# EAGLE board 32u4.Simple.Breakout (EAGLE 7.4.0)
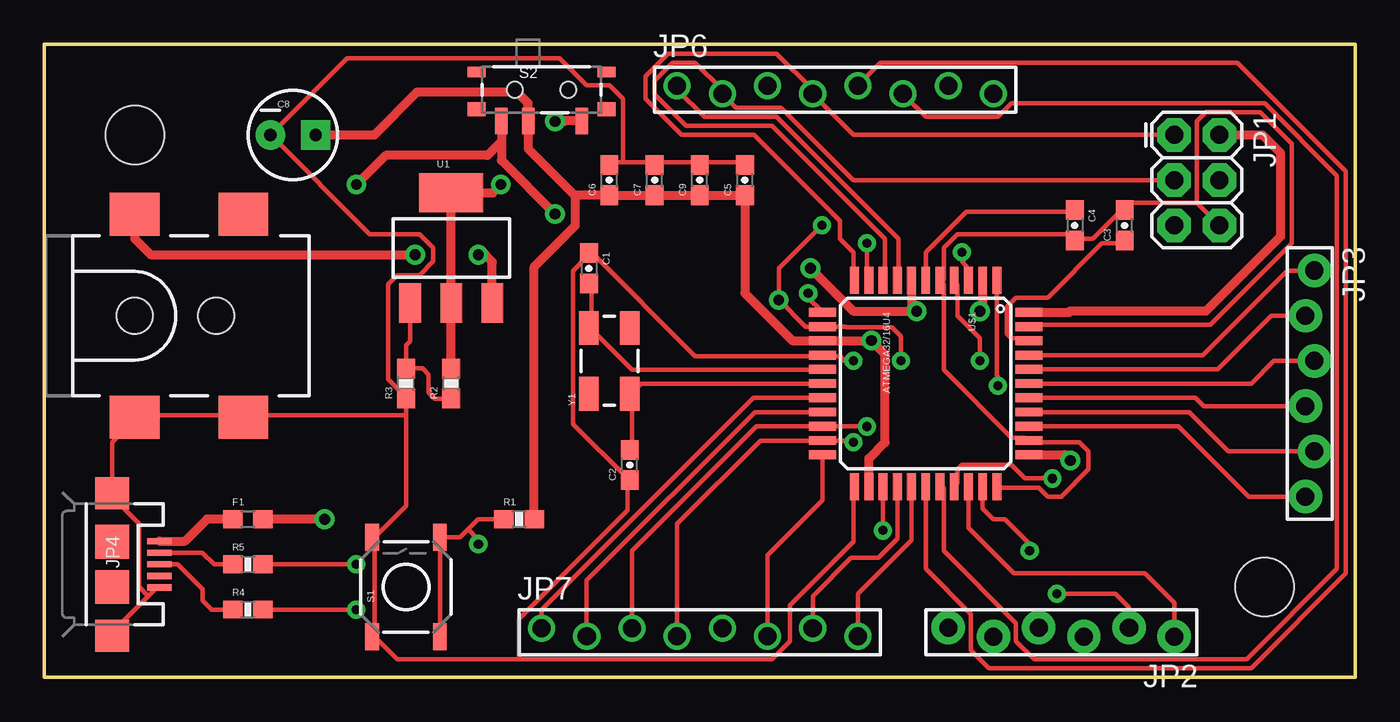
[diagram p0: board, top side]
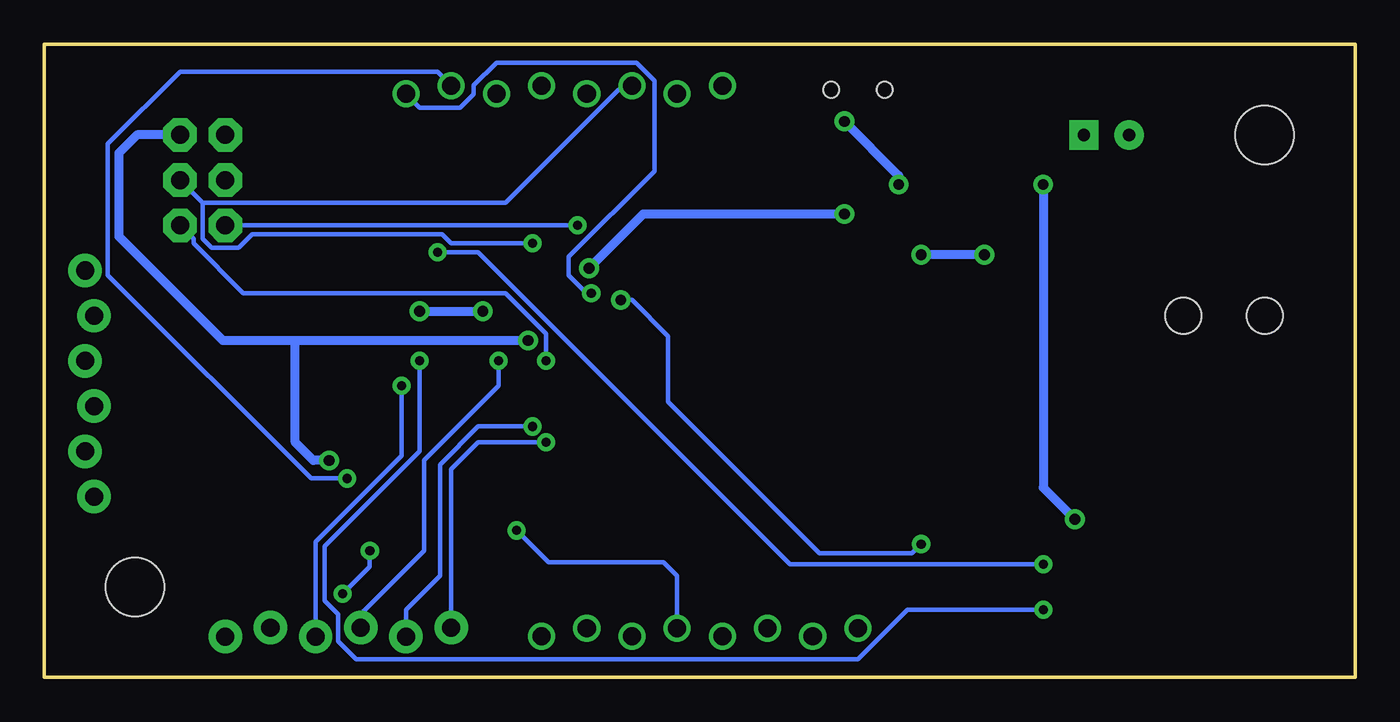
[diagram p1: board, bottom side, seen from below]

Size 73.66 x 35.56 mm. Coordinates in mm from the lower left corner, seen from the top.
Outline: 0,0 73.66,0 73.66,35.56 0,35.56 0,0
Copper layers (1*16): Top 0.035mm / dielectric 1.5mm / Bottom 0.035mm
Design rules "SparkFun-2-layer-STANDARD": minimum track width 10mil, minimum drill 20mil, track to track 10mil, track to pad 8mil, pad to pad 8mil, via to via 10mil, smd to smd 8mil, copper to edge 8mil, drill to drill 8mil, minimum pad ring 10mil, minimum via ring 10mil, stop-mask expansion 4mil, vias tented up to drill 20mil, thermal gap 10mil

## Footprints (pad centres in the part's own frame; a part is rotated, then mirrored left to right if it is on the bottom)
0603-CAP = smd 1.1 x 1: 1 -0.85,0; 2 0.85,0
CPOL-RADIAL-10UF-25V = drill 0.7 pad 1.651 square: 1 1.27,0 | drill 0.7 pad 1.651: 2 -1.27,0
0603 = smd 1.1 x 1: 1 -0.85,0; 2 0.85,0
2X3 = drill 1.016 pad 1.88 octagon: 1 0,0; 2 0,2.54; 3 2.54,0; 4 2.54,2.54; 5 5.08,0; 6 5.08,2.54
1X06_FEMALE_LOCK.010 = drill 1.016 pad 1.88: 1 0,0.254; 2 2.54,-0.254; 3 5.08,0.254; 4 7.62,-0.254; 5 10.16,0.254; 6 12.7,-0.254
USB-MICROB = smd 0.35 x 1.4: D+ 0,2.65; D- -0.65,2.65; GND 1.3,2.65; ID 0.65,2.65; VBUS -1.3,2.65 | smd 1.8 x 1.9: MT1 -4,0; MT2 4,0 | smd 1.9 x 1.9: P$1 -1.27,0; P$2 1.27,0
POWER_JACK_SMD = smd 2.8 x 2.4: GND 0,-5.7; P$4 6.1,-5.7; VIN0 0,5.7; VIN1 6.1,5.7 | hole 2.032: 0,0; 4.572,0
1X08_FEMALE_LOCK = drill 1.016: 1 0,0.229; 2 2.54,-0.229; 3 5.08,0.229; 4 7.62,-0.229; 5 10.16,0.229; 6 12.7,-0.229; 7 15.24,0.229; 8 17.78,-0.229
0603-RES = smd 1.1 x 1: 1 -0.85,0; 2 0.85,0
TACTILE-SWITCH-SMD = smd 1.524 x 0.762: 1 -2.794,1.905; 2 2.794,1.905; 3 -2.794,-1.905; 4 2.794,-1.905
SWITCH-SPST-SMD-A = smd 0.7 x 1.5: 1 -2.25,-1.75; 2 -0.75,-1.75; 3 2.25,-1.75 | smd 1 x 0.6: GND1 -3.65,1; GND3 3.65,1 | smd 1 x 0.8: GND2 -3.65,-1.1; GND4 3.65,-1.1 | hole 0.9: -1.5,0; 1.5,0
SOT223 = smd 1.219 x 2.235: 1 -2.311,-3.099; 2 0,-3.099; 3 2.311,-3.099 | smd 3.6 x 2.2: 4 0,3.099
TQFP_44_0.8MM = smd 1.5 x 0.5: P$1 -5.8,4; P$2 -5.8,3.2; P$3 -5.8,2.4; P$4 -5.8,1.6; P$5 -5.8,0.8; P$6 -5.8,0; P$7 -5.8,-0.8; P$8 -5.8,-1.6; P$9 -5.8,-2.4; P$10 -5.8,-3.2; P$11 -5.8,-4; P$23 5.8,-4; P$24 5.8,-3.2; P$25 5.8,-2.4; P$26 5.8,-1.6; P$27 5.8,-0.8; P$28 5.8,0; P$29 5.8,0.8; P$30 5.8,1.6; P$31 5.8,2.4; P$32 5.8,3.2; P$33 5.8,4 | smd 0.5 x 1.5: P$12 -4,-5.8; P$13 -3.2,-5.8; P$14 -2.4,-5.8; P$15 -1.6,-5.8; P$16 -0.8,-5.8; P$17 0,-5.8; P$18 0.8,-5.8; P$19 1.6,-5.8; P$20 2.4,-5.8; P$21 3.2,-5.8; P$22 4,-5.8; P$34 4,5.8; P$35 3.2,5.8; P$36 2.4,5.8; P$37 1.6,5.8; P$38 0.8,5.8; P$39 0,5.8; P$40 -0.8,5.8; P$41 -1.6,5.8; P$42 -2.4,5.8; P$43 -3.2,5.8; P$44 -4,5.8
STAND-OFF = hole 3.302: 0,0
CRYSTAL-SMD-5X3 = smd 1.9 x 1.1: 1 -1.85,-1.15; 2 1.85,-1.15; 3 1.85,1.15; 4 -1.85,1.15

## Placement (x,y rotation side)
C1  18pf  [0603-CAP]  30.61,22.99 270 top
C2  18pf  [0603-CAP]  32.89,11.94 90 top
C3  10uf  [0603-CAP]  60.71,25.4 90 top
C4  1uf  [0603-CAP]  57.91,25.4 270 top
C5  0.1uf  [0603-CAP]  39.37,27.94 90 top
C6  0.1uf  [0603-CAP]  31.75,27.94 90 top
C7  1uf  [0603-CAP]  34.29,27.94 90 top
C8  10 uf  [CPOL-RADIAL-10UF-25V]  13.97,30.48 0 top
C9  0.1uf  [0603-CAP]  36.83,27.94 90 top
F1  PTC0603  [0603]  11.43,8.89 0 top
FRAME1  FRAME-LETTER  [CREATIVE_COMMONS]  24.13,-8.89 0 top  (outside the outline)
JP1  FEMALE 2x3  [2X3]  63.5,30.48 270 top
JP2  [1X06_FEMALE_LOCK.010]  63.5,2.54 180 top
JP3  [1X06_FEMALE_LOCK.010]  71.12,22.86 270 top
JP4  USB-MICROB  [USB-MICROB]  3.81,6.35 270 top
JP5  5.5x2.1mm Barrel  [POWER_JACK_SMD]  5.08,20.32 0 top
JP6  [1X08_FEMALE_LOCK]  35.56,33.02 0 top
JP7  [1X08_FEMALE_LOCK]  27.94,2.54 0 top
R1  10k  [0603-RES]  26.67,8.89 0 top
R2  240  [0603-RES]  22.86,16.51 90 top
R3  720  [0603-RES]  20.32,16.51 90 top
R4  22  [0603-RES]  11.43,3.81 0 top
R5  22  [0603-RES]  11.43,6.35 0 top
S1  SWITCH-MOMENTARY-2SMD-REDUNDANT  [TACTILE-SWITCH-SMD]  20.32,5.08 90 top
S2  SPDT Switch  [SWITCH-SPST-SMD-A]  27.94,33.02 0 top
U1  [SOT223]  22.86,24.13 0 top
U$1  ATMEGA32/16U4  [TQFP_44_0.8MM]  49.53,16.51 270 top
U$3  [STAND-OFF]  5.08,30.48 0 top
U$4  [STAND-OFF]  68.58,5.08 0 top
Y1  16Mhz  [CRYSTAL-SMD-5X3]  31.75,17.78 90 top

## Library data of the parts
C1-C9 = SparkFun-Capacitors
F1 = SparkFun-PowerIC
FRAME1 = SparkFun-Aesthetics
JP1 = SparkFun-Connectors; PROD_ID: CONN-11566
JP2 JP3 JP6 JP7 = SparkFun-Connectors
JP4 = SparkFun-Connectors; PROD_ID: CONN-09505
JP5 = SparkFun-Connectors; PROD_ID: CONN-08106; SF_ID: PRT-12748
R1-R3 = SparkFun-Passives
R4 R5 = SparkFun-Resistors
S1 = SparkFun-Electromechanical; PROD_ID: SWCH-08247
S2 U$3 U$4 = SparkFun-Electromechanical
U1 = SparkFun-PowerIC; PROD_ID: VREG-08170
U$1 = Kenny
Y1 = SparkFun-FreqCtrl; PROD_ID: XTAL-08218

## Nets
D+: JP4.D+ R4.1
D-: JP4.D- R5.1
DCINVCC: R2.2 S2.3 U1.2 U1.4
GND: C1.1 C2.1 C3.2 C4.2 C5.2 C6.2 C7.2 C8.2 C9.2 JP1.6 JP4.GND JP4.MT1 JP4.MT2 JP5.GND JP5.P$4 R3.1 S1.1 S1.2 U$1.P$5 U$1.P$15 U$1.P$23 U$1.P$33 U$1.P$35 U$1.P$43
N$1: C3.1 U$1.P$42
N$2: C4.1 U$1.P$6
N$3: R2.1 R3.2 U1.1
N$4: JP5.VIN0 U1.3
N$5: R4.2 U$1.P$4
N$6: R5.2 U$1.P$3
N$7: F1.1 JP4.VBUS
PB0/SS: JP6.1 U$1.P$8
PB1/SCK: JP1.3 JP6.2 U$1.P$9
PB2/MOSI: JP1.4 JP6.3 U$1.P$10
PB3/MISO: JP1.1 JP6.4 U$1.P$11
PB4/ADC11: JP6.5 U$1.P$28
PB5/ADC12: JP6.6 U$1.P$29
PB6/ADC13: JP6.7 U$1.P$30
PB7: JP6.8 U$1.P$12
PC6: JP2.1 U$1.P$31
PC7: JP2.2 U$1.P$32
PD0/SCL: JP7.1 U$1.P$18
PD1/INT1: JP7.2 U$1.P$19
PD2/RX1: JP2.5 JP7.3 U$1.P$20
PD3/TX1: JP2.6 JP7.4 U$1.P$21
PD4/ADC8: JP7.5 U$1.P$25
PD5/XCK1: JP7.6 U$1.P$22
PD6/ADC9: JP7.7 U$1.P$26
PD7/ADC10: JP7.8 U$1.P$27
PE6/AIN+: JP2.3 U$1.P$1
PF0/ADC0: JP3.1 U$1.P$41
PF1/ADC1: JP3.2 U$1.P$40
PF4/ADC4: JP3.3 U$1.P$39
PF5/ADC5: JP3.4 U$1.P$38
PF6/ADC6: JP3.5 U$1.P$37
PF7/ADC7: JP3.6 U$1.P$36
RST: JP1.5 JP2.4 R1.1 S1.3 S1.4 U$1.P$13
USBVCC: F1.2 S2.1 U$1.P$2 U$1.P$7
VCC: C5.1 C6.1 C7.1 C8.1 C9.1 JP1.2 R1.2 S2.2 U$1.P$14 U$1.P$24 U$1.P$34 U$1.P$44
XTAL1: C2.2 U$1.P$17 Y1.1
XTAL2: C1.2 U$1.P$16 Y1.3

## Tracks (layer width: path | path; a pad name or v marks a point on that pad's centre or on a via)
D+
  Top 0.254: JP4.D+ 7.49,6.35 8.89,4.95 8.89,4.32 9.4,3.81 R4.1
D-
  Top 0.254: R5.1 9.53,6.35 8.88,7 JP4.D-
DCINVCC  (via drill 0.6)
  Top 0.508: R2.2 U1.2 U1.4 25.2,27.23 v25.65,27.69 | v28.7,31.24 29.21,31.24 29.24,31.27 S2.3
  Bottom 0.508: v25.65,27.69 25.65,28.19 v28.7,31.24
GND  (via drill 0.51)
  Top 0.254: 5.84,4.57 3.81,2.54 JP4.MT2 | 5.84,4.57 6.35,5.08 JP4.GND | 5.84,4.57 5.33,5.08 5.33,8.64 3.81,10.16 JP4.MT1 3.81,13.21 5.08,14.48 JP5.GND 5.08,14.73 11.18,14.73 JP5.P$4 11.43,14.73 20.32,14.73 | 34.29,28.96 32.51,28.96 | 32.51,28.96 31.75,28.96 C6.2 | 34.29,28.96 36.83,28.96 | 34.29,28.96 C7.2 | 36.83,28.96 39.37,28.96 C5.2 | 36.83,28.96 C9.2 | 20.32,14.73 20.32,9.65 18.54,7.87 | 20.32,14.73 R3.1 20.32,15.75 19.3,16.76 19.3,22.1 19.81,22.61 21.08,22.61 21.84,23.37 21.84,24.13 21.08,24.89 18.29,24.89 C8.2 17.02,34.8 28.96,34.8 30.48,33.27 31.75,33.27 32.51,32.51 32.51,28.96 | 64.77,26.67 64.77,31.24 65.28,31.75 68.33,31.75 70.1,29.97 70.1,24.38 65.53,19.81 55.37,19.81 U$1.P$43 | JP1.6 64.77,26.67 | U$1.P$33 53.59,10.67 55.88,10.67 56.39,10.16 57.15,10.16 58.67,11.68 58.67,12.7 58.17,13.21 55.37,13.21 U$1.P$35 55.12,13.46 54.36,13.46 50.55,17.27 50.55,22.1 U$1.P$5 50.55,22.35 50.55,24.13 51.31,24.89 57.66,24.89 57.91,24.64 | 57.91,24.64 58.93,24.64 60.71,26.42 | 57.91,24.64 C4.2 | 64.77,26.67 60.96,26.67 60.71,26.42 | 60.71,26.42 C3.2 | 26.67,1.02 19.81,1.02 18.54,2.29 | 26.67,1.02 40.89,1.02 41.91,2.03 41.91,4.06 45.47,7.62 45.47,10.67 U$1.P$23 | 26.67,1.02 26.67,3.3 32.77,9.4 32.77,10.92 C2.1 32.77,11.18 29.72,14.22 29.72,22.86 30.48,23.62 C1.1 30.73,23.88 36.58,18.03 43.69,18.03 U$1.P$15 43.94,18.03 44.7,18.03 44.96,17.78 v45.47,17.78 | 18.54,2.29 18.54,7.87 | 18.54,7.87 S1.2 | 18.54,2.29 S1.1
  Bottom 0.254: JP1.6 65.28,24.64 65.28,24.38 62.48,21.59 47.75,21.59 45.47,19.3 v45.47,17.78
N$1
  Top 0.254: C3.1 60.71,24.38 59.44,24.38 56.39,21.34 54.61,21.34 54.1,20.83 54.1,19.3 54.36,19.05 55.12,19.05 U$1.P$42
N$2
  Top 0.254: U$1.P$6 49.53,23.88 51.82,26.16 57.91,26.16 C4.1
N$3
  Top 0.254: U1.1 20.55,18.9 20.32,18.67 R3.2 21.25,17.36 21.59,17.02 21.59,16 21.93,15.66 R2.1
N$4  (via drill 0.6)
  Top 0.508: JP5.VIN0 5.08,24.64 5.97,23.75 v20.83,23.75 | v24.38,23.75 24.77,23.75 25.17,23.34 U1.3
  Bottom 0.508: v20.83,23.75 v24.38,23.75
N$5  (via drill 0.51)
  Top 0.254: v17.53,3.81 R4.2 | v52.58,17.78 52.58,19.05 51.31,20.32 51.31,22.1 U$1.P$4
  Bottom 0.254: v17.53,3.81 25.15,3.81 27.94,1.02 56.13,1.02 57.15,2.03 57.15,3.56 57.91,4.32 57.91,7.37 52.58,12.7 v52.58,17.78
N$6  (via drill 0.51)
  Top 0.254: v17.53,6.35 R5.2 | v51.56,23.88 51.56,23.37 51.82,23.11 51.82,22.35 U$1.P$3
  Bottom 0.254: v17.53,6.35 31.75,6.35 49.28,23.88 v51.56,23.88
N$7
  Top 0.508: JP4.VBUS 7.9,7.65 9.14,8.89 F1.1
PB0/SS
  Top 0.254: U$1.P$8 48.01,22.35 48.01,24.64 41.15,31.5 37.08,31.5 35.56,33.02 JP6.1
PB1/SCK
  Top 0.254: U$1.P$9 47.24,22.35 47.24,24.64 40.89,30.99 36.07,30.99 34.29,32.77 34.29,33.53 35.31,34.54 36.58,34.54 38.1,33.02 JP6.2 38.1,32.77 38.86,32 41.4,32 45.47,27.94 JP1.3
PB2/MOSI  (via drill 0.51)
  Top 0.254: v46.23,24.38 46.23,22.35 U$1.P$10
  Bottom 0.254: v46.23,24.38 50.8,24.38 51.31,24.89 61.98,24.89 62.74,24.13 64.26,24.13 64.77,24.64 64.77,26.67 | JP1.4 64.77,26.67 | 64.77,26.67 47.75,26.67 41.4,33.02 40.64,33.02 JP6.3
PB3/MISO
  Top 0.254: U$1.P$11 45.47,22.35 45.47,23.88 44.7,24.64 44.7,25.65 39.88,30.48 35.81,30.48 33.78,32.51 33.78,33.78 35.05,35.05 41.15,35.05 43.18,33.02 JP6.4 43.18,32.77 45.47,30.48 JP1.1
PB4/ADC11
  Top 0.254: U$1.P$28 49.53,6.1 52.07,3.56 52.07,1.52 53.09,0.51 67.82,0.51 73.15,5.84 73.15,28.45 67.06,34.54 46.99,34.54 45.72,33.27 JP6.5
PB5/ADC12
  Top 0.254: U$1.P$29 50.55,10.67 50.55,7.11 54.61,3.05 54.61,2.03 55.63,1.02 67.56,1.02 72.64,6.1 72.64,28.19 68.58,32.26 54.36,32.26 53.59,31.5 49.53,31.5 48.26,32.77 JP6.6
PB6/ADC13  (via drill 0.51)
  Top 0.254: v56.64,11.18 55.12,11.18 54.36,11.94 51.56,11.94 51.31,11.68 51.31,10.92 U$1.P$30
  Bottom 0.254: v56.64,11.18 58.67,11.18 70.1,22.61 70.1,29.97 66.04,34.04 51.56,34.04 50.8,33.27 JP6.7
PB7  (via drill 0.51)
  Top 0.254: v42.93,21.59 42.93,21.34 43.69,20.57 U$1.P$12
  Bottom 0.254: v42.93,21.59 43.18,21.59 44.2,22.61 44.2,23.62 39.37,28.45 39.37,33.53 40.39,34.54 48.26,34.54 49.53,33.27 49.53,32.77 50.29,32 52.58,32 53.34,32.77 JP6.8
PC6
  Top 0.254: U$1.P$31 51.93,8.39 54.48,5.84 61.85,5.84 63.5,4.19 JP2.1
PC7  (via drill 0.51 pad 0.25)
  Top 0.254: JP2.2 60.96,3.94 60.2,4.7 v56.9,4.7 | v55.37,7.11 55.37,7.49 53.98,8.89 53.34,8.89 52.73,9.5 U$1.P$32
  Bottom 0.254: v56.9,4.7 55.37,6.22 v55.37,7.11
PD0/SCL
  Top 0.254: JP7.1 27.94,3.81 39.84,15.71 U$1.P$18
PD1/INT1
  Top 0.254: JP7.2 30.48,5.46 39.93,14.91 U$1.P$19
PD2/RX1  (via drill 0.51 pad 0.25)
  Top 0.254: JP7.3 33.02,7.11 40.02,14.11 U$1.P$20 46.22,14.11 v46.23,14.1
  Bottom 0.254: v46.23,14.1 49.28,14.1 51.44,11.94 51.44,5.71 53.34,3.81 JP2.5
PD3/TX1  (via drill 0.51 pad 0.25)
  Top 0.254: JP7.4 35.56,8.64 40.23,13.31 U$1.P$21 45.36,13.31 v45.47,13.21
  Bottom 0.254: v45.47,13.21 49.28,13.21 50.8,11.68 JP2.6
PD4/ADC8  (via drill 0.51 pad 0.25)
  Top 0.254: v47.12,8.26 47.12,9.14 | 47.12,9.14 47.12,9.27 | U$1.P$25 47.13,9.16 47.12,9.14
  Bottom 0.254: JP7.5 38.1,5.71 38.86,6.48 45.34,6.48 v47.12,8.26
PD5/XCK1
  Top 0.254: U$1.P$22 43.73,9.95 40.64,6.86 JP7.6
PD6/ADC9
  Top 0.254: U$1.P$26 47.93,7.8 46.86,6.73 45.34,6.73 43.18,4.57 JP7.7
PD7/ADC10
  Top 0.254: JP7.8 45.72,4.7 48.73,7.71 U$1.P$27
PE6/AIN+  (via drill 0.51 pad 0.25)
  Top 0.254: v53.59,16.38 53.59,16.89 53.53,16.95 U$1.P$1
  Bottom 0.254: JP2.3 58.42,7.62 53.59,12.45 v53.59,16.38
PF0/ADC0
  Top 0.254: JP3.1 69.85,22.86 65.1,18.11 U$1.P$41
PF1/ADC1
  Top 0.254: JP3.2 68.96,20.32 65.95,17.31 U$1.P$40
PF4/ADC4
  Top 0.254: JP3.3 69.09,17.78 67.82,16.51 U$1.P$39
PF5/ADC5
  Top 0.254: JP3.4 65.15,15.24 64.68,15.71 U$1.P$38
PF6/ADC6
  Top 0.254: JP3.5 66.55,12.7 64.34,14.91 U$1.P$37
PF7/ADC7
  Top 0.254: JP3.6 67.69,10.16 63.74,14.11 U$1.P$36
RST  (via drill 0.51 pad 0.25, 0.6)
  Top 0.254: 23.81,8.32 23.37,7.87 S1.4 S1.3 | 23.81,8.32 24.38,8.89 R1.1 | v24.38,7.49 24.38,7.75 23.81,8.32 | v48.13,17.78 48.13,19.18 47.62,19.68 45.09,19.68 45.06,19.71 U$1.P$13 42.77,19.71 v41.27,21.21 41.27,22.99 v43.69,25.4
  Bottom 0.254: v41.27,21.21 40.64,21.21 38.61,19.18 38.61,15.49 30.1,6.99 24.89,6.99 v24.38,7.49 | JP2.4 55.88,3.56 52.32,7.11 52.32,12.19 48.13,16.38 v48.13,17.78 | v43.69,25.4 JP1.5
USBVCC  (via drill 0.6)
  Top 0.508: S2.1 25.69,30.14 | 25.69,30.14 24.89,29.34 19.18,29.34 v17.53,27.69 | v15.75,8.89 F1.2 | U$1.P$2 52.73,20.73 v52.58,20.57 | U$1.P$7 48.73,21.12 48.77,21.08 48.77,20.83 v49.02,20.57 45.47,20.57 v43.05,22.99 | 25.69,30.14 25.69,29.05 v28.7,26.04
  Bottom 0.508: v17.53,27.69 17.53,10.67 v15.75,8.89 | v52.58,20.57 v49.02,20.57 | v28.7,26.04 40.01,26.04 v43.05,22.99
VCC  (via drill 0.6)
  Top 0.508: 29.97,27.09 C6.1 C7.1 C9.1 C5.1 39.37,21.59 42.04,18.92 43.72,18.92 U$1.P$14 v46.47,18.91 v46.48,18.92 47.24,18.16 47.24,13.21 46.33,12.29 U$1.P$24 | 29.97,27.09 29.81,27.09 27.19,29.71 S2.2 27.19,32.25 26.54,32.89 20.95,32.89 18.54,30.48 C8.1 | R1.2 27.52,23.07 29.84,25.4 29.84,26.96 29.97,27.09 | JP1.2 68.45,30.48 69.47,29.46 69.47,24.77 65.28,20.57 57.66,20.57 57.59,20.51 U$1.P$44 | U$1.P$34 57.34,12.51 v57.66,12.19
  Bottom 0.508: v46.48,18.92 59.56,18.92 | 59.56,18.92 63.63,18.92 69.47,24.77 69.47,29.46 68.45,30.48 JP1.2 | v57.66,12.19 58.55,12.19 59.56,13.21 59.56,18.92
XTAL1
  Top 0.254: C2.2 33.02,12.95 33.02,15.75 Y1.1 33.02,16 33.53,16.51 U$1.P$17
XTAL2
  Top 0.254: C1.2 30.73,22.1 30.73,19.81 Y1.3 30.73,19.56 33.02,17.27 43.69,17.27 U$1.P$16